# EAGLE board sch1 (EAGLE 8.4.3)
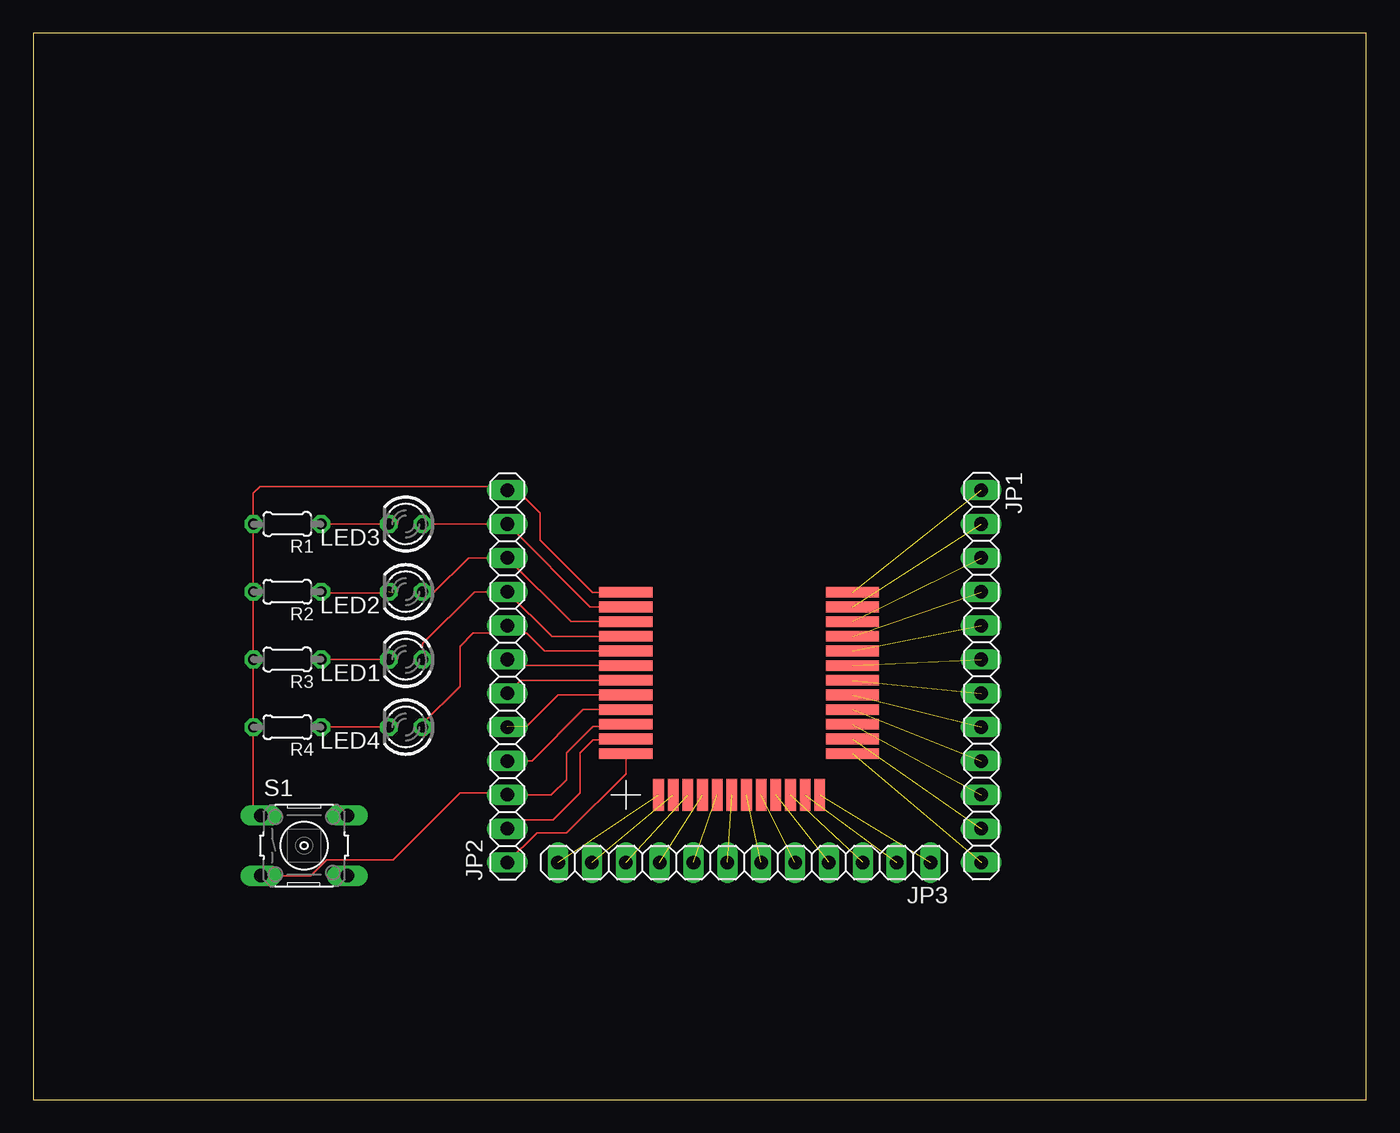
[diagram p0: board, top side]

Size 100 x 80 mm. Coordinates in mm from the lower left corner, seen from the top.
Outline: 0,0 100,0 100,80 0,80 0,0
Copper layers (1*16): Top 0.035mm / dielectric 1.5mm / Bottom 0.035mm
Design rules "default": minimum track width 6mil, minimum drill 0.35mm, track to track 6mil, track to pad 6mil, pad to pad 6mil, via to via 6mil, smd to smd 6mil, copper to edge 40mil, drill to drill 6mil, minimum pad ring 10mil, minimum via ring 8mil, stop-mask expansion 4mil, vias tented up to drill 0mil, thermal gap 10mil

## Footprints (pad centres in the part's own frame; a part is rotated, then mirrored left to right if it is on the bottom)
1X12 = drill 1.016 long: 1 -13.97,0; 2 -11.43,0; 3 -8.89,0; 4 -6.35,0; 5 -3.81,0; 6 -1.27,0; 7 1.27,0; 8 3.81,0; 9 6.35,0; 10 8.89,0; 11 11.43,0; 12 13.97,0
LED3MM = drill 0.813 octagon: A -1.27,0; K 1.27,0
0204/5 = drill 0.813 octagon: 1 -2.54,0; 2 2.54,0
B3F-10XX = drill 1.016 long: 1 -3.251,2.261; 2 3.251,2.261; 3 -3.251,-2.261; 4 3.251,-2.261
SMD_PAD_VERSION = smd 4 x 0.8: P$01 0,15.2; P$02 0,14.1; P$03 0,13; P$04 0,11.9; P$05 0,10.8; P$06 0,9.7; P$07 0,8.6; P$08 0,7.5; P$09 0,6.4; P$10 0,5.3; P$11 0,4.2; P$12 0,3.1; P$25 17,3.1; P$26 17,4.2; P$27 17,5.3; P$28 17,6.4; P$29 17,7.5; P$30 17,8.6; P$31 17,9.7; P$32 17,10.8; P$33 17,11.9; P$34 17,13; P$35 17,14.1; P$36 17,15.2 | smd 0.8 x 2.4: P$13 2.45,0; P$14 3.55,0; P$15 4.65,0; P$16 5.75,0; P$17 6.85,0; P$18 7.95,0; P$19 9.05,0; P$20 10.15,0; P$21 11.25,0; P$22 12.35,0; P$23 13.45,0; P$24 14.55,0

## Placement (x,y rotation side)
JP1  [1X12]  71.12,31.75 270 top
JP2  [1X12]  35.56,31.75 90 top
JP3  [1X12]  53.34,17.78 180 top
LED1  [LED3MM]  27.94,33.02 180 top
LED2  [LED3MM]  27.94,38.1 180 top
LED3  [LED3MM]  27.94,43.18 180 top
LED4  [LED3MM]  27.94,27.94 180 top
R1  [0204/5]  19.05,43.18 180 top
R2  [0204/5]  19.05,38.1 180 top
R3  [0204/5]  19.05,33.02 180 top
R4  [0204/5]  19.05,27.94 180 top
S1  [B3F-10XX]  20.32,19.05 0 top
U$1  HZX_MODULE  [SMD_PAD_VERSION]  44.45,22.86 0 top

## Library data of the parts
JP1-JP3 = pinhead
LED1-LED4 = led
R1-R4 = resistor
S1 = switch-omron; MPN: B3F-1000; OC_FARNELL: 176432; OC_NEWARK: 36M3542
U$1 = HZX_MODULE; AUTHOR: Agam

## Nets
N$1: JP1.1 U$1.P$36
N$2: JP1.2 U$1.P$35
N$3: JP1.3 U$1.P$34
N$4: JP1.4 U$1.P$33
N$5: JP1.5 U$1.P$32
N$6: JP1.6 U$1.P$31
N$7: JP1.7 U$1.P$30
N$8: JP1.8 U$1.P$29
N$9: JP1.9 U$1.P$28
N$10: JP1.10 U$1.P$27
N$11: JP1.11 U$1.P$26
N$12: JP1.12 U$1.P$25
N$13: JP2.1 U$1.P$12
N$14: JP2.2 U$1.P$11
N$15: JP2.3 S1.3 U$1.P$10
N$16: JP2.4 U$1.P$09
N$17: JP2.5 U$1.P$08
N$18: JP2.6 U$1.P$07
N$19: JP2.7 U$1.P$06
N$20: JP2.8 LED4.A U$1.P$05
N$21: JP2.9 LED1.A U$1.P$04
N$22: JP2.10 LED2.A U$1.P$03
N$23: JP2.11 LED3.A U$1.P$02
N$24: JP2.12 R1.2 R2.2 R3.2 R4.2 S1.1 U$1.P$01
N$25: JP3.1 U$1.P$24
N$26: JP3.2 U$1.P$23
N$27: JP3.3 U$1.P$22
N$28: JP3.4 U$1.P$21
N$29: JP3.5 U$1.P$20
N$30: JP3.6 U$1.P$19
N$31: JP3.7 U$1.P$18
N$32: JP3.8 U$1.P$17
N$33: JP3.9 U$1.P$16
N$34: JP3.10 U$1.P$15
N$35: JP3.11 U$1.P$14
N$36: JP3.12 U$1.P$13
N$38: LED4.K R4.1
N$39: LED1.K R3.1
N$40: LED2.K R2.1
N$41: LED3.K R1.1

## Tracks (layer width: path | path; a pad name or v marks a point on that pad's centre or on a via)
N$1  (1 unrouted)
N$2  (1 unrouted)
N$3  (1 unrouted)
N$4  (1 unrouted)
N$5  (1 unrouted)
N$6  (1 unrouted)
N$7  (1 unrouted)
N$8  (1 unrouted)
N$9  (1 unrouted)
N$10  (1 unrouted)
N$11  (1 unrouted)
N$12  (1 unrouted)
N$13
  Top 0.127: JP2.1 37.78,20 40,20 44.45,24.45 U$1.P$12
N$14
  Top 0.127: U$1.P$11 44.39,27 42,27 41,26 41,23 39,21 36.24,21 JP2.2
N$15
  Top 0.127: U$1.P$10 44.29,28 42,28 40,26 40,24 38.86,22.86 36,22.86 | 36,22.86 JP2.3 | S1.3 20.79,16.79 22,18 27,18 32,23 35.86,23 36,22.86
N$16
  Top 0.127: U$1.P$09 41.26,29.26 37.4,25.4 JP2.4
N$17  (1 unrouted)
  Top 0.127: U$1.P$08 39.36,30.36 37,28
N$18
  Top 0.127: JP2.6 36.54,31.46 U$1.P$07
N$19
  Top 0.127: U$1.P$06 36.02,32.56 JP2.7
N$20
  Top 0.127: U$1.P$05 38.34,33.66 37,35 36.12,35 JP2.8 35,35 33,35 32,34 32,31 29.21,28.21 LED4.A
N$21
  Top 0.127: U$1.P$04 38.9,34.76 JP2.9 33.1,38.1 29.21,34.21 LED1.A
N$22
  Top 0.127: U$1.P$03 40.34,35.86 JP2.10 32.64,40.64 30,38 29.31,38 LED2.A
N$23
  Top 0.127: U$1.P$02 41.78,36.96 35.87,42.87 JP2.11 LED3.A
N$24
  Top 0.127: U$1.P$01 41.94,38.06 38,42 38,44 36.28,45.72 JP2.12 35.28,46 17,46 16.51,45.51 R1.2 R2.2 | 17,38.59 R2.2 | R2.2 16.51,38 R3.2 R4.2 16.51,21.87 S1.1
N$25  (1 unrouted)
N$26  (1 unrouted)
N$27  (1 unrouted)
N$28  (1 unrouted)
N$29  (1 unrouted)
N$30  (1 unrouted)
N$31  (1 unrouted)
N$32  (1 unrouted)
N$33  (1 unrouted)
N$34  (1 unrouted)
N$35  (1 unrouted)
N$36  (1 unrouted)
N$38
  Top 0.127: R4.1 LED4.K
N$39
  Top 0.127: R3.1 LED1.K
N$40  (1 unrouted)
  Top 0.127: R2.1 21.69,38 27,38
N$41
  Top 0.127: R1.1 LED3.K